# Altium PCB Peggy Receiver.PcbDoc
Units mm, origin at the board's own origin, x right, y up, seen from the top; angles counter-clockwise.
Board outline 30 x 53.7 mm, 2 copper layers (Top Layer, Bottom Layer), stack 1.534 mm thick; 30 components, 25 nets, 116 pads, 8 vias.
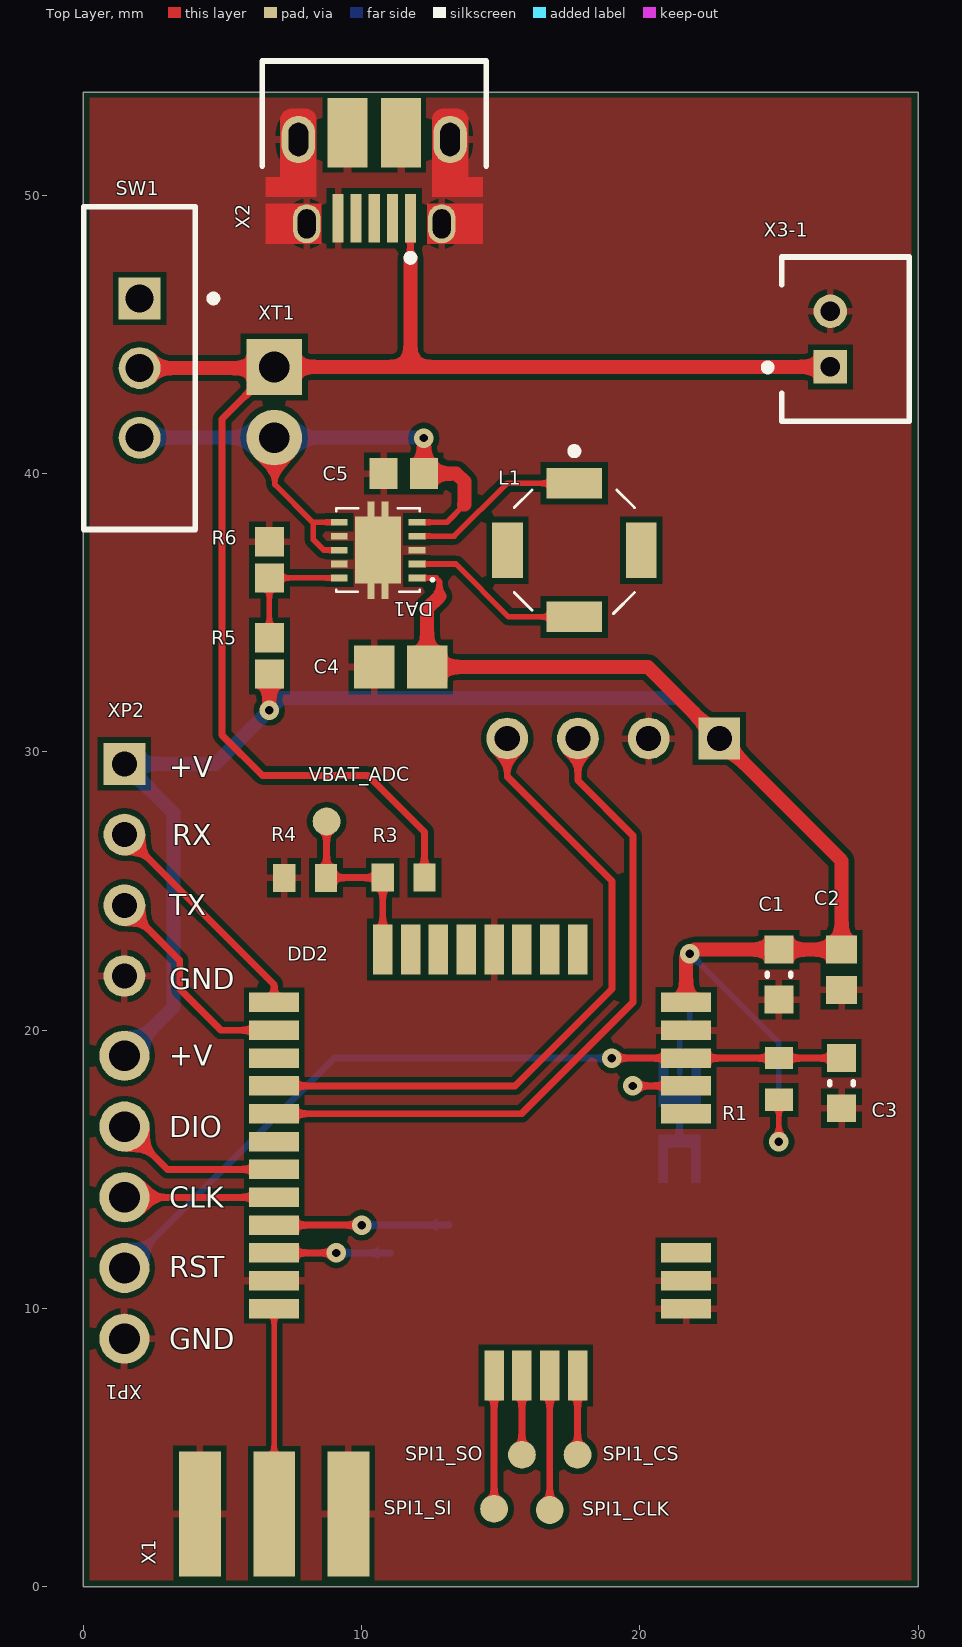
[diagram p0: Top Layer view]
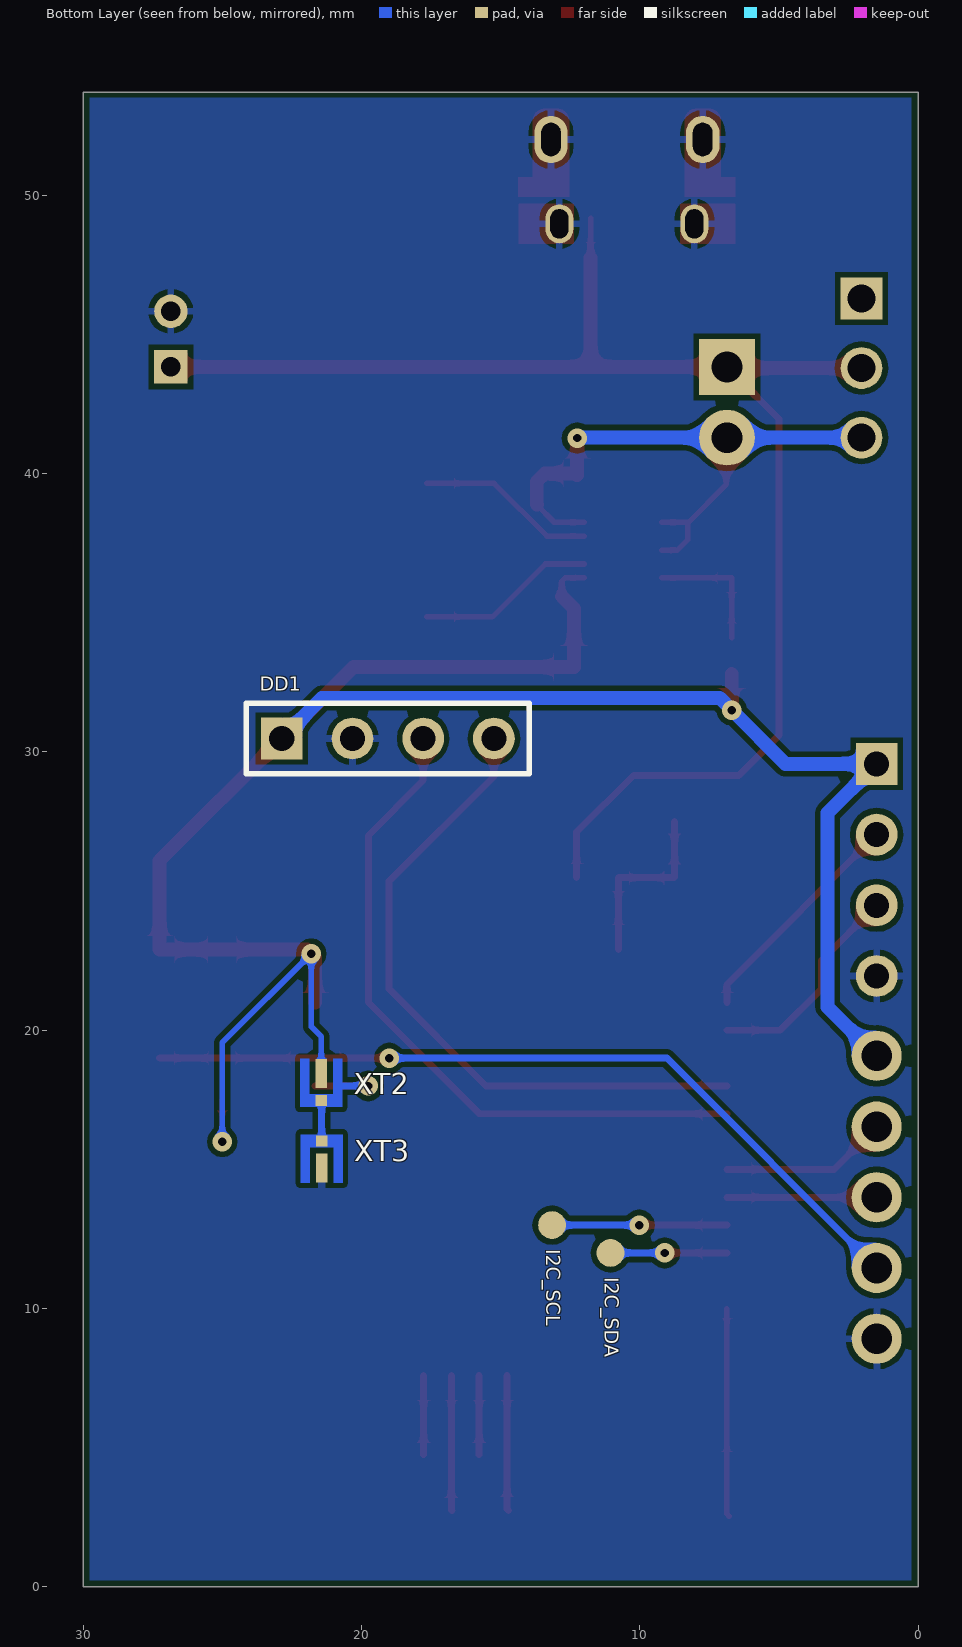
[diagram p1: Bottom Layer view, seen from below]
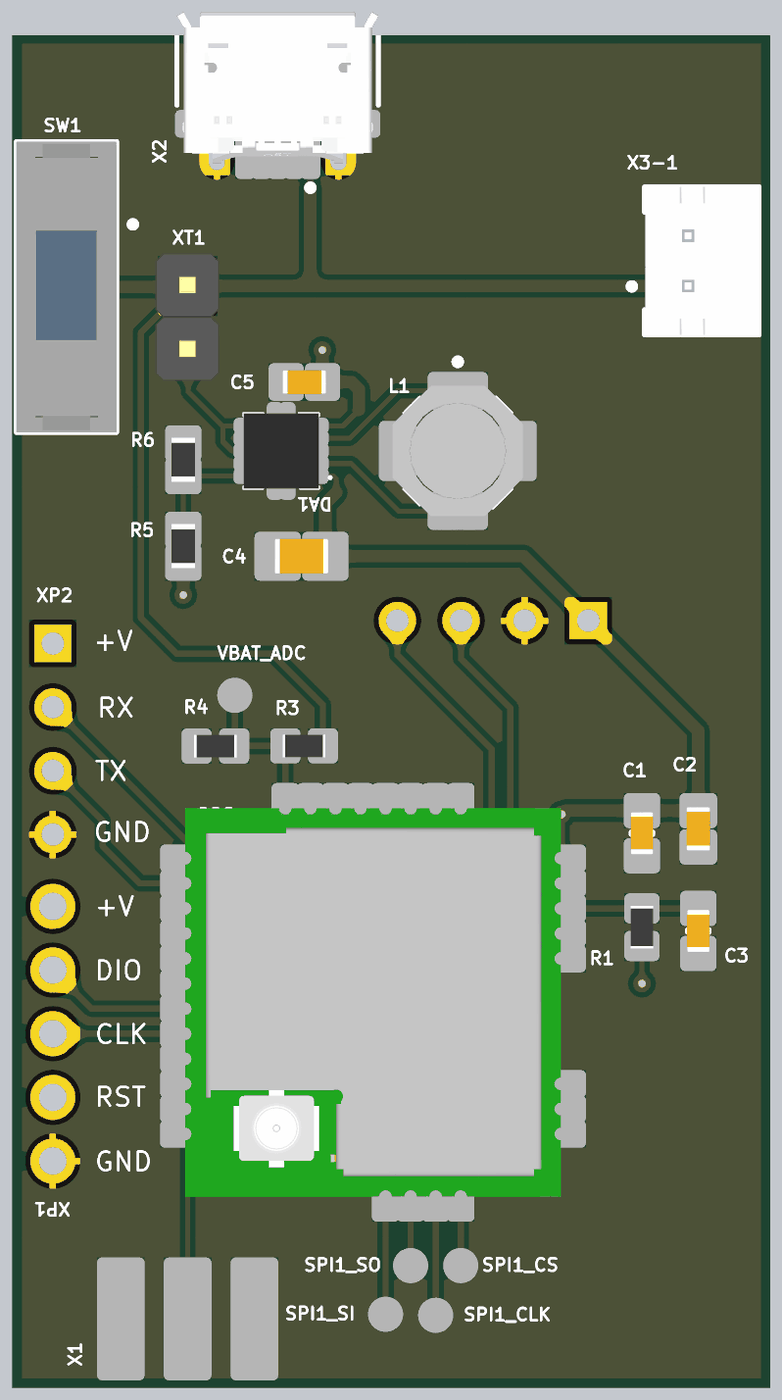
[diagram p2: 3D render of the assembled board from above, using the file's embedded part models]

## Layer stack, top to bottom
Top Solder: solder mask 0.0127, Solder Resist, Dk 3.3
Top Layer: signal copper 0.0178
Dielectric1: core 1.4986, FR-4, Dk 4.3
Bottom Layer: signal copper 0.0178
Bottom Solder: solder mask 0.0127, Solder Resist, Dk 3.3

## Board outline
0,0 0,53.7 30,53.7 30,0

## Design rules (kind name [scope] priority, off if disabled: settings)
Clearance [All] p1: gap=0.2 ignorepadtopadclearanceinfootprint=FALSE
ComponentClearance [All] p1: gap=0.25 collisioncheckmode=3 verticalgap=0.25 showdistances=FALSE
DiffPairsRouting [All] p1: maxlimit=0.25 minlimit=0.15 mostfreqgap=0.25 toplayer_minwidth=0.15 toplayer_maxwidth=0.254 toplayer_prefwidth=0.254 bottomlayer_minwidth=0.15 bottomlayer_maxwidth=0.254 bottomlayer_prefwidth=0.254 maxuncoupledlength=12.7
HoleSize [All] p1: absolutevalues=TRUE maxlimit=8 minlimit=0.3 maxpercent=80.000 minpercent=20.000
MinimumAnnularRing [All] p1: minimumring=0.2
MinimumSolderMaskSliver [All] p1: minsoldermaskwidth=0.15
PasteMaskExpansion [All] p1: expansion=0.2
PlaneClearance [All] p1: clearance=0.381
PlaneConnect [All] p1: pad.planeconnectstyle=Relief pad.reliefexpansion=0.508 pad.reliefentries=4 pad.reliefconductorwidth=0.254 pad.reliefairgap=0.254 via.planeconnectstyle=Direct via.reliefexpansion=0.508 via.reliefentries=4 via.reliefconductorwidth=0.254 via.reliefairgap=0.254
PolygonConnect PolygonConnect_GND [(InNet('GND') AND InComponent('DA1'))] p1: thpad.connectstyle=Relief thpad.reliefconductorwidth=0.254 thpad.reliefentries=4 thpad.polygonreliefangle="90 Angle" thpad.airgapwidth=0.2 smdpad.connectstyle=Direct smdpad.reliefconductorwidth=0.254 smdpad.reliefentries=4 smdpad.polygonreliefangle="90 Angle" smdpad.airgapwidth=0.254 via.connectstyle=Relief via.reliefconductorwidth=0.254 via.reliefentries=4 via.polygonreliefangle="90 Angle" via.airgapwidth=0.2
PolygonConnect [All] p2: thpad.connectstyle=Relief thpad.reliefconductorwidth=0.254 thpad.reliefentries=4 thpad.polygonreliefangle="90 Angle" thpad.airgapwidth=0.2 smdpad.connectstyle=Relief smdpad.reliefconductorwidth=0.254 smdpad.reliefentries=4 smdpad.polygonreliefangle="90 Angle" smdpad.airgapwidth=0.2 via.connectstyle=Direct via.reliefconductorwidth=0.254 via.reliefentries=4 via.polygonreliefangle="90 Angle" via.airgapwidth=0.254
RoutingCorners [All] p1: cornerstyle=45-Degree minsetback=2.5 maxsetback=2.5
RoutingVias [All] p1: holewidth=0.3 width=0.6 viastyle="Through Hole" minholewidth=0.3 minwidth=0.6 maxholewidth=0.5 maxwidth=0.8
SMDEntry [All] p1: side=TRUE corner=TRUE anyangle=FALSE
SMDNeckDown [All] p1: percent=100.000
SMDToCorner [All] p1: distance=78740
SilkToSilkClearance [All] p1: silktosilkclearance=0.15
SilkToSolderMaskClearance SilkscreenOverComponentPads [IsPad] p1: minsilkscreentomaskgap=0.15 clearancetoexposedcopper=TRUE
SolderMaskExpansion [All] p1: expansion=0.2 istentingtop=FALSE
UnRoutedNet [All] p1: checkbadconnections=TRUE
Width [All] p1: maxlimit=0.5 minlimit=0.15 preferedwidth=0.2 minimp=50.000000 maximp=50.000000 favimp=50.000000
19 further rules are at their usual default settings.

## Components (designator, comment, footprint, x,y, rotation, side; value= is the part's Value field where it differs from the comment)
C1 "GCM188R71H104KA57D" CAPC1608X09M 25,22 r90 top value=100nF
C2 "C0603C106M8PAC7867" CAPC1608X87X35ML15T15 27.25,22.175 r90 top value=10µF
C3 "GCM188R71H104KA57D" CAPC1608X09M 27.25,18.1 r90 top value=100nF
C4 "C2012X5R1C226K125AC" CAPC2013X140X45ML15T25 11.412,33.05 r0 top value=22µF
C5 "C0603C106M8PAC7867" CAPC1608X87X35ML15T15 11.525,40 r0 top value=10µF
DA1 "TPS63000IDRCRQ1" TPS63002DRCR 10.6,37.25 r180 top
DD1 "HC-08" HC-08 22.86,30.48 r180 bottom
DD2 "RAK3172(H)" RAK3172(H)-Footprint-1 21.767,7.5 r90 top
I2C_SCL "TP_1MM" "New footprint 1" 13.15,13 r90 bottom
I2C_SDA "TP_1MM" "New footprint 1" 11.05,12 r90 bottom
L1 "SRU5018-3R5Y" SRU5018680Y 17.65,37.25 r90 top value=3.5µH
R1 "RNCF0603BTE10K0" RESC1608X55X25ML10T15 25,18.25 r90 top
R3 "RMCF0603FT100K" RESC1608X55X25ML10T15 11.517,25.483 r0 top
R4 "ERJ-3EKF2373V" RESC1608X55X25ML10T15 7.975,25.475 r0 top
R5 "RMCF0603JT1M00" RESC1608X95X40ML15T20 6.694,33.45 r270 top value=1M
R6 "ERJ-3EKF1783V" RESC1608X95X40ML15T20 6.694,36.9 r270 top value=178k
SPI1_CLK "TP_1MM" "New footprint 1" 16.767,2.767 r90 top
SPI1_CS "TP_1MM" "New footprint 1" 17.767,4.75 r270 top
SPI1_SI "TP_1MM" "New footprint 1" 14.767,2.809 r90 top
SPI1_SO "TP_1MM" "New footprint 1" 15.767,4.75 r90 top
SW1 "EG1218" ESWI-EG1218_V 2.032,43.79 r270 top
VBAT_ADC "TP_1MM" "New footprint 1" 8.75,27.5 r90 top
X1 "CON-SMA-EDGE-S" RFSOLUTIONS_CON-SMA-EDGE-S 6.867,2.623 r180 top
X2 "10103594-0001LF" FCI-10103594-0001LF_V 10.462,50.61 r180 top
X3-1 "B2B-PH-K-S" JST-S2B-PH-K-S_V 29.296,44.83 r90 top
XP1 "5-146278-5" 5-146278-8-Footprint-1 1.488,14 r270 top
XP2 "61300411121" 20021311-00010T4LF-Footprint-1 1.488,29.57 r270 top
XT1 "Jumper_1x2" "CON%3A PLS-2" 6.867,42.56 r270 top
XT2 "Jumper_solderable" JUMPER-Footprint-2 21.442,18.075 r180 bottom
XT3 "Jumper_solderable" JUMPER-Footprint-2 21.425,15.425 r0 bottom

## Footprints (in the part's own frame and the unit in brackets; to place one, negate y for a bottom-side part, rotate by r counter-clockwise, add the part's x,y. Pads: shape width x height; smd on the part's side, far side on the other; paste and mask are expansions set on the pad)
5-146278-8-Footprint-1 [mm]
  round 1.8 hole 1.1: 1(-5.08,0) 2(-2.54,0) 3(0,0) 4(2.54,0) 5(5.08,0)
20021311-00010T4LF-Footprint-1 [mm]
  rect 1.5x1.5 hole 0.9: 1(0,0)
  round 1.5 hole 0.9: 2(2.54,0) 3(5.08,0) 4(7.62,0)
CAPC1608X09M [mm] "Chip Capacitor, 2-Leads, Body 1,60x0,80mm, IPC Low Density"
  rect 1x1.05 smd: 1(-0.9,0) 2(0.9,0)
  silkscreen extent -0.05,-0.43 0.05,0.43, body extent -0.85,-0.45 0.85,0.45, height 0.9
CAPC1608X87X35ML15T15 [mm] "Chip Capacitor, 2-Leads, Body 1.75x0.95mm, IPC Low Density"
  rect 1x1.1 smd: 1(-0.725,0) 2(0.725,0)
  body extent -0.87,-0.48 0.87,0.48, height 0.87
CAPC2013X140X45ML15T25 [mm] "Chip Capacitor, 2-Leads, Body 2.15x1.4mm, IPC Low Density"
  rect 1.45x1.55 smd: 1(-0.95,0) 2(0.95,0)
  body extent -1.07,-0.7 1.08,0.7, height 1.4
"CON%3A PLS-2" [mm]
  rect 2x2 hole 1.1: 1(-1.27,0)
  round 2 hole 1.1: 2(1.27,0)
  body extent -2.57,-1.28 2.51,1.26, height 8.54
ESWI-EG1218_V [mm] "THD, 3-Leads, Body 11.6x4mm, Pitch 2.5mm"
  rect 1.5x1.5 hole 1: 1(-2.5,0)
  round 1.5 hole 1: 2(0,0) 3(2.5,0)
  silkscreen extent -5.8,-2 5.8,2.78, body extent -5.8,-2 5.8,2, height 7.4
FCI-10103594-0001LF_V [mm] "SMD, 5-Leads, Body 8.04x5.62mm, Pitch 0.65 mm"
  rect 0.4x1.75 smd: 1(-1.3,1.435) 2(-0.65,1.435) 3(0,1.435) 4(0.65,1.435) 5(1.3,1.435)
  oval 1x1.4 hole 0.65 slot 1.05 at 90 deg: 6(-2.425,1.64) 7(2.425,1.64)
  oval 1.2x1.7 hole 0.7 slot 1.2 at 90 deg: 8(2.725,-1.39) 9(-2.725,-1.39)
  rect 1.425x2.5 smd: 10(-0.962,-1.64) 11(0.962,-1.64)
  Top Layer region: 3.9,2.37 1.9,2.37 1.9,0.91 3.9,0.91
  Top Layer region: -3.9,0.91 -1.9,0.91 -1.9,2.37 -3.9,2.37
  Top Layer region: 3.375,-0.04 3.375,-2.09 3.373,-2.129 3.369,-2.167 3.365,-2.185 3.359,-2.203 3.348,-2.239 3.329,-2.277 3.308,-2.312 3.284,-2.344 3.258,-2.374 3.227,-2.401 3.194,-2.426 3.158,-2.446 3.121,-2.464 3.08,-2.477 3.049,-2.483 3.012,-2.488 2.975,-2.49 2.475,-2.49 2.432,-2.488 2.391,-2.481 2.351,-2.471 2.312,-2.456 2.28,-2.439 2.249,-2.421 2.217,-2.396 2.19,-2.37 2.164,-2.342 2.143,-2.312 2.121,-2.277 2.105,-2.241 2.093,-2.209 2.088,-2.192 2.084,-2.175 2.08,-2.155 2.076,-2.134 2.075,-2.112 2.075,-2.09 2.075,-0.04 2.075,0.66 3.9,0.66 3.9,-0.04
  Top Layer region: -3.375,-0.04 -3.375,-2.09 -3.373,-2.129 -3.369,-2.167 -3.365,-2.185 -3.359,-2.203 -3.348,-2.239 -3.329,-2.277 -3.308,-2.312 -3.284,-2.344 -3.258,-2.374 -3.227,-2.401 -3.194,-2.426 -3.158,-2.446 -3.121,-2.464 -3.08,-2.477 -3.049,-2.483 -3.012,-2.488 -2.975,-2.49 -2.475,-2.49 -2.432,-2.488 -2.391,-2.482 -2.351,-2.471 -2.312,-2.456 -2.28,-2.439 -2.249,-2.421 -2.217,-2.397 -2.19,-2.37 -2.164,-2.342 -2.143,-2.312 -2.121,-2.277 -2.105,-2.241 -2.093,-2.209 -2.088,-2.192 -2.084,-2.175 -2.08,-2.155 -2.076,-2.134 -2.075,-2.112 -2.075,-2.09 -2.075,-0.04 -2.075,0.66 -3.9,0.66 -3.9,-0.04
  silkscreen extent -4.02,-4.21 4.02,2.98, body extent -4.02,-4.15 4.02,1.88, height 2.9
HC-08 [mm] "Bluetooth 4.0 Module HC-08"
  rect 1.5x1.5 hole 0.9: 1(0,0)
  round 1.5 hole 0.9: 2(2.54,0) 3(5.08,0) 4(7.62,0)
  silkscreen extent -1.27,-1.27 8.89,1.27
JST-S2B-PH-K-S_V [mm] "THD, 2-Leads, Body 7.6x5.9mm, Pitch 2mm"
  rect 1.2x1.2 hole 0.7: 1(-1,2.45)
  round 1.2 hole 0.7: 2(1,2.45)
  silkscreen extent -2.95,-0.38 2.95,4.82, body extent -2.95,-0.34 2.95,4.16, height 6
JUMPER-Footprint-2 [mm]
  rect 0.4x0.4 smd paste+0 mask+0: 1(0,-0.6)
  rect 0.4x1.05 smd mask+0: 2(0,0.375)
  Top Layer region: 0.425,-0.375 0.425,0.9 0.75,0.9 0.75,-0.825 -0.75,-0.825 -0.75,0.9 -0.425,0.9 -0.425,-0.375
"New footprint 1" [mm]
  round 1 smd: 1(0,0)
RAK3172(H)-Footprint-1 [mm]
  rect 0.7x1.8 smd: 1(13.5,14.9) 2(12.5,14.9) 3(11.5,14.9) 4(10.5,14.9) 5(9.5,14.9) 6(8.5,14.9) 7(7.5,14.9) 8(6.5,14.9) 9(5.5,14.9) 10(4.5,14.9) 11(3.5,14.9) 12(2.5,14.9) 17(2.5,0.1) 18(3.5,0.1) 19(4.5,0.1) 20(9.5,0.1) 21(10.5,0.1) 22(11.5,0.1) 23(12.5,0.1) 24(13.5,0.1)
  rect 1.8x0.7 smd: 13(0.1,7) 14(0.1,6) 15(0.1,5) 16(0.1,4) 25(15.4,4) 26(15.4,5) 27(15.4,6) 28(15.4,7) 29(15.4,8) 30(15.4,9) 31(15.4,10) 32(15.4,11)
  body extent 0,0 15.5,15, height 3.5
RESC1608X55X25ML10T15 [mm] "Chip Resistor, 2-Leads, Body 1.70x0.90mm, IPC Low Density"
  rect 0.8x1 smd: 1(-0.75,0) 2(0.75,0)
  body extent -0.85,-0.45 0.85,0.45, height 0.55
RESC1608X95X40ML15T20 [mm] "Chip Resistor, 2-Leads, Body 1.75x0.95mm, IPC Low Density"
  rect 1.05x1.05 smd: 1(-0.65,0) 2(0.65,0)
  body extent -0.87,-0.48 0.87,0.48, height 0.95
RFSOLUTIONS_CON-SMA-EDGE-S [mm] "CONN SMA JACK STR EDGE MNT"
  rect 1.5x4.5 smd: 1(0,0) 2(-2.667,0) 2(2.667,0)
  body extent -3.18,-1.52 3.18,11.63, height 3.55
SRU5018680Y [mm]
  rect 1.1x2 smd: 1(2.4,0) 2(-2.4,0)
  rect 2x1.1 smd: 3(0,-2.4) 4(0,2.4)
  silkscreen extent -2.29,-2.16 3.68,2.16, body extent -2.6,-2.6 2.6,2.6, height 1.8
TPS63002DRCR [mm]
  rect 0.6x0.24 smd: 1(-1.4,1) 2(-1.4,0.5) 3(-1.4,0) 4(-1.4,-0.5) 5(-1.4,-1) 6(1.4,-1) 7(1.4,-0.5) 8(1.4,0) 9(1.4,0.5) 10(1.4,1)
  rect 1.65x2.4 smd: 11(0,0)
  rect 0.25x0.6 smd: 12(0.25,1.45) 13(-0.25,1.45) 14(0.25,-1.45) 15(-0.25,-1.45)
  silkscreen extent -2.01,-1.5 1.5,1.5, body extent -1.5,-1.5 1.5,1.5, height 1

## Part data
C1 C3: library part CMP-001-00128-7, "CAP CER 0.1UF 50V X7R 0603", Capacitance=100nF, Case Code (Metric)=1608, Case/Package=0603, Color=Grey, Dielectric=X7R, Manufacturer=Murata, Max Operating Temperature=125°C, Min Operating Temperature=-55°C, Package Quantity=1, Ratings=AEC-Q200, Tolerance=10%, Voltage=50V, Approvals=CSA,UR, ComponentLink1Description=https://datasheet.ciiva.com/16624/product-16624562.pdf?src-supplier=Avnet+Europe, ComponentLink1URL=https://datasheet.ciiva.com/16624/product-16624562.pdf?src-supplier=Avnet+Europe, ComponentLink2Description=https://datasheet.ciiva.com/133/product-133574.pdf?src-supplier=Digi-Key, ComponentLink2URL=https://datasheet.ciiva.com/133/product-133574.pdf?src-supplier=Digi-Key, ComponentLink3Description=https://datasheet.ciiva.com/133/product-133575.pdf?src-supplier=Digi-Key, ComponentLink3URL=https://datasheet.ciiva.com/133/product-133575.pdf?src-supplier=Digi-Key, ComponentLink4Description=https://datasheet.ciiva.com/18183/getdatasheetpartid-98693-18183626.pdf?src-supplier=Verical, ComponentLink4URL=https://datasheet.ciiva.com/18183/getdatasheetpartid-98693-18183626.pdf?src-supplier=Verical, ComponentLink5Description=https://datasheet.ciiva.com/11786/0900766b80ef92d0-11786863.pdf?src-supplier=RSComponents, ComponentLink5URL=https://datasheet.ciiva.com/11786/0900766b80ef92d0-11786863.pdf?src-supplier=RSComponents, ComponentLink6Description=https://datasheet.ciiva.com/133/product-133573.pdf?src-supplier=Digi-Key, ComponentLink6URL=https://datasheet.ciiva.com/133/product-133573.pdf?src-supplier=Digi-Key, ComponentLink7Description=https://datasheet.ciiva.com/2989/product-2989242.pdf?src-supplier=Avnet, ComponentLink7URL=https://datasheet.ciiva.com/2989/product-2989242.pdf?src-supplier=Avnet, ComponentLink8Description=https://datasheet.ciiva.com/16497/product-16497247.pdf?src-supplier=Future+Electronics, ComponentLink8URL=https://datasheet.ciiva.com/16497/product-16497247.pdf?src-supplier=Future+Electronics, Construction=Flat, Depth=0.8mm, Design Item ID=1_16, Height=0.8mm, Lead Free="Lead Free", Length=1.6mm, Manufacturer Part Number=GCM188R71H104KA57D, Mount="Surface Mount", Packaging="Tape and Reel", Pricing 1="1=0,11000, 10=0,07900, 50=0,04280, 100=0,03500, 500=0,02502, 1000=0,01966 (USD)", Radiation Hardening=No, REACH SVHC="No SVHC", RoHS=Yes, RoHS Compliant=Yes, Series=GCM, Source=Meteo_1.SCHLIB, Stock 1=4755830, Termination=SMD/SMT, Thickness=0.035inch, Voltage Rating=50V, Voltage Rating (DC)=50V, Width=0.031inch
C2 C5: library part CMP-009-00284-3, "Cap Ceramic 10uF 10V X5R 20% SMD 0603 85°C Paper T/R", Capacitance=10µF, Case Code (Imperial)=0603, Case Code (Metric)=1608, Manufacturer=KEMET, Max Operating Temperature=85°C, Min Operating Temperature=-55°C, Tolerance=20%, Voltage Rating=10V, Case/Package=0603, Manufacturer Part Number=C0603C106M8PAC7867, Mount="Surface Mount", Mounting Technology=SMT, Packaging="Cut Tape", Pins=2, RoHS Compliant=Yes
C4: library part CMP-001-00144-2, "TDK - C2012X5R1C226K125AC - SMD Multilayer Ceramic Capacitor, 22 µF, 16 V, 0805 [2012 Metric], ± 10%, X5R, C Series", Capacitance=22µF, Case Code (Imperial)=0805, Case Code (Metric)=2012, Dielectric=X5R, Dielectric Material=Ceramic, Manufacturer=TDK, Max Operating Temperature=85°C, Min Operating Temperature=-55°C, Package Quantity=1, Tolerance=10%, Voltage=16V, Case/Package=0805, Construction=Flat, Depth=1.25mm, Height=1.25mm, Lead Free="Lead Free", Length=2mm, Manufacturer Part Number=C2012X5R1C226K125AC, Mount="Surface Mount", Number of Pins=2, Packaging="Tape and Reel", REACH SVHC="No SVHC", Resistor Type=Ceramic, RoHS Compliant=Yes, Series=C, Termination=Wraparound, Thickness=0.057inch, Voltage Rating=16V, Voltage Rating (DC)=16V, Weight=0.000194oz, Width=0.049inch
DA1: library part CMP-031-00015-5, "IC REG BUCK BOOST ADJ 1.6A 10SON", Case/Package=VSON, Manufacturer="Texas Instruments", Manufacturer Part Number=TPS63000DRCR, Max Input Voltage=5.5V, Max Operating Temperature=85°C, Max Output Current=1.2A, Min Input Voltage=1.8V, Min Operating Temperature=-40°C, Min Output Voltage=1.2V, Output Current=1.6A, Package Quantity=1, Quiescent Current=40uA, Switching Frequency=1.5MHz, Contact Plating=Gold, Efficiency=96%, Lead Free="Lead Free", Max Output Voltage=5.5V, Number of Outputs=1, Number of Pins=10, Operating Supply Voltage=5.5V, Output Configuration=Positive, Output Type=Adjustable, Output Voltage=5.5V, Packaging="Tape and Reel", RoHS Compliant=Yes, Series="Automotive, AEC-Q100", Synchronous Rectifier=Yes, Topology=Buck-Boost, Weight=0.000921oz, Width=3mm
DD1: library part CMP-00025-00009-1, "Bluetooth 4.0 Module", Manufacturer=HC-08, Manufacturer Part Number=HC-08
DD2: library part CMP-00025-00003-1, "RAK3172 WisDuo LPWAN Module", Manufacturer="RAK Wireless", Manufacturer Part Number=RAK3172(H)
I2C_SCL I2C_SDA SPI1_CLK SPI1_CS SPI1_SI SPI1_SO VBAT_ADC: library part CMP-002-00080-5, "Test Point, 1mm diam", Manufacturer=SRG_DEV, Manufacturer Part Number=TP_1MM, Pins=1
L1: library part CMP-006-00039-3, "Ind Power Shielded Wirewound 3.5uH 30% 100KHz 9Q-Factor Ferrite 2.1A T/R", Case/Package=5018, Current Rating=2.1A, DC Resistance (DCR)=32mR, Inductance=3.5uH, Manufacturer=Bourns, Max Operating Temperature=125°C, Min Operating Temperature=-40°C, Package Quantity=1000, Saturation Current=1.7A, Self Resonant Frequency=90MHz, Test Frequency=100kHz, Tolerance=30%, Core Material=Ferrite, DC Current=2.1A, Depth=5.4mm, Height=1.8mm, Length=5.2mm, Manufacturer Part Number=SRU5018-3R5Y, Max DC Current=2.1A, Military Standard=Not, Mount="Surface Mount", Number of Pins=2, Packaging="Tape and Reel", Q Factor=9, RoHS Compliant=Yes, Series=SRU5018, Shielding=Shielded, Termination=SMD/SMT, Width=0.205inch
R1: library part CMP-009-00270-3, "RES 10K OHM 0.1% 1/16W 0603", Case Code (Imperial)=0603, Case Code (Metric)=1608, Max Operating Temperature=155°C, Max Power Dissipation=100mW, Min Operating Temperature=-55°C, Package Quantity=5000, Power Rating=63mW, Resistance=10k, Resistor Type="Thin Film", Temperature Coefficient=25ppm/°C, Tolerance=0.1%, Voltage Rating=75V, Case/Package=0603, Component Comment="10k 63mW", Contact Plating=Tin,Matte, Features="Moisture Resistant", Height=0.022inch, Lead Free="Lead Free", Length=0.063inch, Mount="Surface Mount", Number of Terminations=2, Packaging="Tape and Reel", Pins=2, Radiation Hardening=No, RoHS Compliant=Yes, Series=RNCF, Size Code=0603, Width=0.031inch
R3: library part CMP-009-00253-1, "RES 100K OHM 1% 1/10W 0603", Case Code (Imperial)=0603, Case Code (Metric)=1608, Manufacturer="Stackpole Electronics Inc", Max Operating Temperature=155°C, Max Power Dissipation=100mW, Min Operating Temperature=-55°C, Resistance=100k, Resistor Type="Thick Film", Temperature Coefficient=100ppm/°C, Tolerance=1%, Working Voltage=75V, Case/Package=0603, Component Comment="100k 100mW", Construction=Rectangular, Contact Plating=Tin,Matte, Depth=0.8mm, Features="Automotive AEC-Q200", Height=0.022inch, Lead Free="Lead Free", Length=1.55mm, Manufacturer Part Number=RMCF0603FT100K, Military Standard=Not, Mount="Surface Mount", Number of Terminations=2, Packaging="Tape and Reel", Power Rating=100mW, Radiation Hardening=No, RoHS Compliant=Yes, Series=RMCF, Width=0.031inch
R4: library part CMP-009-00311-2, "RES SMD 237K OHM 1% 1/10W 0603", Case Code (Imperial)=0603, Case Code (Metric)=1608, Manufacturer=Panasonic, Max Operating Temperature=155°C, Max Power Dissipation=100mW, Min Operating Temperature=-55°C, Package Quantity=1, Resistance=237k, Resistance Tolerance=1%, Resistor Type="Thick Film", Temperature Coefficient=100ppm/°C, Voltage Rating=75V, Voltage Rating (DC)=50V, Case/Package=0603, Component Comment="237k 100mW", Construction=Rectangular, Contact Plating=Tin, Depth=0.8mm, Features="Automotive AEC-Q200", Height=0.45mm, Length=1.6mm, Manufacturer Part Number=ERJ-3EKF2373V, Military Standard=Not, Mount="Surface Mount", Number of Terminations=2, Packaging="Tape and Reel", Power Rating=100mW, Radiation Hardening=No, REACH SVHC=Yes, RoHS Compliant=Yes, Series=ERJ, Technology="THICK FILM", Termination=SMD/SMT, Tolerance=1%, Width=0.8mm
R5: library part CMP-00024-2, "RES 1M OHM 5% 1/10W 0603", Case Code (Imperial)=0603, Case Code (Metric)=1608, Manufacturer="Stackpole Electronics", Max Operating Temperature=155°C, Max Power Dissipation=100mW, Min Operating Temperature=-55°C, Resistance=1M, Resistor Type="Thick Film", Temperature Coefficient=200ppm/°C, Tolerance=5%, Working Voltage=75V, Case/Package=0603, Component Comment="1M 100mW", Construction=Rectangular, Contact Plating=Tin,Matte, Depth=0.8mm, Features="Automotive AEC-Q200", Height=0.022inch, Lead Free="Lead Free", Length=1.55mm, Manufacturer Part Number=RMCF0603JT1M00, Military Standard=Not, Mount="Surface Mount", Number of Terminations=2, Packaging="Tape and Reel", Power Rating=100mW, Radiation Hardening=No, RoHS Compliant=Yes, Series=RMCF, Technology="THICK FILM", Width=0.031inch
R6: library part CMP-00025-2, "ICK FILM, RESISTOR, 178KOHM, 100mW, ±1%; Product Range:PANASONIC - ERJ Series; Resistance:178kohm; Power Rating:100mW; Resistance Tolerance:± 1%; Resistor Case Style:0603 ^1608 Metric]; Resistor Element Type:Thick Film; MSL:-", Case Code (Imperial)=0603, Case Code (Metric)=1608, Manufacturer=Panasonic, Max Operating Temperature=155°C, Max Power Dissipation=100mW, Min Operating Temperature=-55°C, Package Quantity=1, Resistance=178k, Resistance Tolerance=1%, Resistor Type="Thick Film", Temperature Coefficient=100ppm/°C, Voltage Rating=75V, Voltage Rating (DC)=50V, Case/Package=0603, Component Comment="178k 100mW", Construction=Rectangular, Contact Plating=Tin, Depth=0.8mm, Features="Automotive AEC-Q200", Height=0.45mm, Lead Free="Lead Free", Length=1.6mm, Manufacturer Part Number=ERJ-3EKF1783V, Military Standard=Not, Mount="Surface Mount", Number of Terminations=2, Packaging="Tape and Reel", Power Rating=100mW, REACH SVHC="No SVHC", RoHS Compliant=Yes, Series=ERJ, Technology="THICK FILM", Termination=SMD/SMT, Tolerance=1%, Width=0.8mm
SW1: library part CMP-011-00006-2, "Slide Switch, SPDT, 500 V, -20 to 70 degC, 3-Pin THD, RoHS, Bulk", Contact Current Rating=200mA, Manufacturer=E-Switch, Max Operating Temperature=70°C, Min Operating Temperature=-20°C, Operating Force=250gf, Package Description="3-Pin Through Hole Device, Body 11.6 x 4 mm, Pitch 2.5 mm", Package Quantity=1000, Voltage Rating (AC)=30V, Case/Package=EG1218, Contact Finish=Silver, Contact Material=Copper, Contact Plating=Silver, Current Rating=200mA, Datasheet URL=https://www.e-switch.com/system/asset/product_line/data_sheet/119/EG.pdf, Datasheet Version=Oct-15, Manufacturer Part Number=EG1218, Manufacturer URL=http://www.e-switch.ch/en/, Mounting Technology=TH, Package Reference=EG1218, Packaging=Bulk, Pins=3, RoHS Compliant=True, Throw Configuration=SPDT, Voltage Rating (DC)=30V
X1: library part CMP-002-00086-2, "CONN SMA JACK STR EDGE MNT", Case/Package=SMA, Manufacturer="RF Solutions", Package Quantity=1, Connector Type=SMA,Socket, Fastening Type=Threaded, Manufacturer Part Number=CON-SMA-EDGE-S, Mount=Edge, Number of Ports=1, Pins=3, Termination=Solder
X2: library part CMP-002-00038-6, "Micro USB 2.0 B Receptacle, 5 Position, Height 3.24 mm, -55 to 85 degC, RoHS, Tape and Reel", Case/Package=FCI-10103594-0001LF, Current Rating=1.8A, Manufacturer="Amphenol ICC (FCI)", Max Operating Temperature=85°C, Min Operating Temperature=-55°C, Package Description="5-Pin Surface Mount Device, Body 8.04 x 5.62 mm", Package Quantity=1500, Voltage Rating=100V, Connector Type=USB, Contact Material=Copper, Contact Plating=Gold, Datasheet URL=http://portal.fciconnect.com/Comergent//fci/drawing/10103594.pdf, Datasheet Version="Rev. A, 06/2010", Gender=Female, Lead Pitch=0.65mm, Manufacturer Part Number=10103594-0001LF, Manufacturer URL=http://portal.fciconnect.com/, Mounting Technology=SM, Package Reference=FCI-10103594-0001LF, Packaging=TapeandReel, Pins=5, RoHS Compliant=True
X3-1: library part CMP-002-00125-1, "CONN HEADER VERT 2POS 2MM", Case/Package=S2B-PH-K-S, Manufacturer="Japan Solderless Terminals", Manufacturer Part Number="JST B2B-PH-K-S(LF)(SN)", Max Operating Temperature=85°C, Min Operating Temperature=-25°C, Connector Type=Header, Gender=Male, Height=0.35inch, Length=0.2inch, Mounting Technology=SM, Pins=2, RoHS Compliant=Unknown, Weight=0.0625lb, Width=0.24inch
XP1: library part CMP-002-00131-1, "Conn Unshrouded Header HDR 5 POS 2.54mm Solder ST Thru-Hole Carton", Color=Black, Contact Current Rating=3A, Flammability Rating="UL94 V-0", High Temperature Housing=Yes, Manufacturer="TE Connectivity", Manufacturer Part Number=5-146278-8, Max Operating Temperature=105°C, Min Operating Temperature=-65°C, Package Quantity=480, Approvals=CSA, Board Standoff="Yes (With)", Connector Type=Plug,Header,Pin, Contact Gender=Male, Contact Material=Bronze, Contact Mating Length=0.23inch, Contact Plating=Tin, Contact Post Length=0.12inch, Contact Protection="No (Without)", Contact Shape=Square, Contact Type="Male Pin", Depth=2.34mm, ELV=Compliant, Gasket="No (Without)", Gender=Male, High Speed Serial Data Connector=No, Housing Color=Black, Housing Material=Polymer, Keyed=No, Lead Free="Lead Free", Length=12.29mm, Mating Alignment="No (Without)", Mating Connector Lock="No (Without)", Mount="Through Hole", Number of Contacts=5, Number of Positions=5, Number of Rows=1, Orientation=Straight, Packaging=Carton, PCB Mount Retention=Without, PCB Mounting Orientation=Vertical, PCB Thickness=0.062inch, Pins=5, Pitch=2.54mm, Radiation Hardening=No, RoHS Compliant=Yes, Row Spacing=2.54mm, Selectively Loaded="No (Without)", Series="AMPMODU MOD II", Stabilizers="No (Without)", Strain Relief="No (Without)", Termination="Through Hole"
XP2: library part CMP-002-00092-4, "Conn Unshrouded Header HDR 4 POS 2.54mm Solder ST Thru-Hole Bag", Color=Black, Manufacturer="Würth Elektronik", Connector Type="Male Pin", Contact Material=Copper, Contact Mating Length=0.236inch, Contact Plating=Gold, Gender=Male, Lead Free="Lead Free", Manufacturer Part Number=61300411121, Mount="Through Hole", Number of Contacts=4, Number of Positions=4, Number of Rows=1, Packaging=Bulk, Pins=4, Pitch=0.1inch, Position=4, REACH SVHC=Unknown, RoHS Compliant=Yes, Termination=Solder
XT1: library part CMP-002-00088-9, "WURTH ELEKTRONIK - 61300211121 - Pin Header, Vertical, Board-to-Board, 2.54 mm, 1 Rows, 2 Contacts, Through Hole Straight", Color=Black, Current Rating=3A, Manufacturer="Wurth Electronics", Manufacturer Part Number=61300211121, Max Operating Temperature=125°C, Min Operating Temperature=-40°C, Supplier Part Number 1=732-5315-ND, Voltage Rating=250V, Connector Type="Male Pin", Contact Gender=Male, Contact Material="Copper Alloy,Copper", Contact Mating Length=0.236inch, Contact Plating=Gold, Contact Type="Male Pin", Gender=Male, Housing Material=PBT, Lead Free="Lead Free", Mount="Through Hole", Number of Contacts=2, Number of Positions=2, Number of Rows=1, Packaging=Bulk, Pins=2, Pitch=0.1inch, REACH SVHC=Unknown, Series=WR-PHD, Supplier 1=Digi-Key, Termination="Through Hole"
XT2 XT3: library part CMP-002-00130-2, "Solderable Jumper", Manufacturer="Home made", Max Operating Temperature=125°C, Min Operating Temperature=-40°C, Connector Type="Male Pin", Gender=Male, Manufacturer Part Number="Home made", Pins=2

## Via types
v1: diameter 0.7, hole 0.3, Top Layer to Bottom Layer, tented both sides, 8 vias

## Nets (pads, with @x,y where several pads share a name; then routed paths per layer and width w, separated by ;. In a path a pad name is that pad's centre, name@x,y a point inside that pad or via, vN(x,y) a via of type N, cw(c..) or ccw(c..) an arc to the next point about the centre after c; other vN are vias at no path point)
3.3V: C1.2 C2.2 C4.2 DA1.1 DD1.1 DD2.24 R1.1 R5.2 XP1.1 XP2.1 XT2.2 | length 82.8
  Top Layer w0.2: DA1.1 12.683,36.25 12.8,36.133 12.8,35.592 ; v1(25,16) R1.1
  Top Layer w0.5: v1(6.694,31.5) R5.2 ; 12.8,35.592 12.362,35.154 C4.2 20.29,33.05 DD1.1 27.25,26.09 C2.2 C1.2 21.96,22.9 v1@21.667,22.607 ; DD2.24 21.667,22.563 21.8,22.696 v1(21.8,22.75)
  Bottom Layer w0.2: XT2.2 21.442,18.775 21.442,19.775 21.8,20.133 v1(21.8,22.75) 25,19.55 v1(25,16)
  Bottom Layer w0.5: XP1.1 3.25,20.842 3.25,27.808 XP2.1 4.764,29.57 v1(6.694,31.5) 7.125,31.93 21.41,31.93 DD1.1
GND: C1.1 C2.1 C3.1 C4.1 C5.1 DA1.3 DA1.7 DA1.9 DA1.11 DA1.12 DA1.13 DA1.14 DA1.15 DD1.2 DD2.11 DD2.17 DD2.18 DD2.23 DD2.28 R4.1 R6.1 X1.2 X2.5 X2.6 X2.7 X2.8 X2.9 X2.10 X2.11 X3-1.2 XP1.5 XP2.4 XT3.2
LORA_RST: C3.2 DD2.22 R1.2 XP1.4 | length 28.9
  Top Layer w0.25: v1(19,19) DD2.22 R1.2 C3.2
  Bottom Layer w0.25: XP1.4 9.028,19 v1(19,19)
NetC5_2: C5.2 DA1.5 DA1.6 DA1.8 SW1.3 XT1.2 | length 22.2
  Top Layer w0.2: XT1.2 6.893,41.264 6.893,39.607 8.27,38.23 8.27,37.628 8.648,37.25 DA1.8 ; 8.25,38.25 DA1.6 ; DA1.5 13.07,38.25 13.692,38.872 13.692,38.888
  Top Layer w0.5: v1(12.243,41.275) 12.25,41.268 C5.2@12.25,39.95 ; C5.2 13.407,40 13.7,39.707 13.7,38.895 13.692,38.888
  Bottom Layer w0.5: SW1.3 XT1.2 12.228,41.29 v1(12.243,41.275)
NetDA1_2: DA1.2 L1.2 | length 6.4
  Top Layer w0.2: DA1.2 13.392,36.75 15.292,34.85 L1.2
NetDA1_4: DA1.4 L1.1 | length 6.4
  Top Layer w0.2: DA1.4 13.332,37.75 15.232,39.65 L1.1
NetDA1_10: DA1.10 R5.1 R6.2 | length 4.7
  Top Layer w0.2: R5.1 R6.2 DA1.10
NetDD1_3: DD1.3 DD2.5 | length 24.8
  Top Layer w0.25: DD2.5 15.75,17 19.75,21 19.75,27 17.78,28.97 DD1.3
NetDD1_4: DD1.4 DD2.4 | length 24.1
  Top Layer w0.25: DD2.4 15.525,18 19,21.475 19,25.357 15.24,29.117 DD1.4
NetDD2_9: DD2.9 I2C_SCL.1 | length 6.3
  Top Layer w0.25: DD2.9 v1(10.018,13)
  Bottom Layer w0.25: v1(10.018,13) I2C_SCL.1
NetDD2_10: DD2.10 I2C_SDA.1 | length 4.2
  Top Layer w0.25: DD2.10 v1(9.1,12)
  Bottom Layer w0.25: v1(9.1,12) I2C_SDA.1
NetDD2_12: DD2.12 X1.1 | length 7.5
  Top Layer w0.2: X1.1@6.786,2.542 X1.1 DD2.12
NetDD2_13: DD2.13 SPI1_SI.1 | length 4.9
  Top Layer w0.25: SPI1_SI.1@14.708,2.75 SPI1_SI.1 DD2.13
NetDD2_14: DD2.14 SPI1_SO.1 | length 2.8
  Top Layer w0.25: SPI1_SO.1 DD2.14
NetDD2_15: DD2.15 SPI1_CLK.1 | length 4.9
  Top Layer w0.25: SPI1_CLK.1@16.75,2.75 SPI1_CLK.1 DD2.15
NetDD2_16: DD2.16 SPI1_CS.1 | length 2.8
  Top Layer w0.25: SPI1_CS.1 DD2.16
NetDD2_21: DD2.21 XT2.1 XT3.1 | length 4.5
  Top Layer w0.25: v1(19.75,18) DD2.21
  Bottom Layer w0.25: v1(19.75,18) 20.867,18 ; XT3.1 21.425,17.458 XT2.1
NetTP1_1: 
NetTP2_1: 
RX: DD2.1 XP2.2 | length 8.3
  Top Layer w0.25: XP2.2 6.867,21.651 DD2.1
SWCLK: DD2.8 XP1.3 | length 5.4
  Top Layer w0.25: XP1.3 DD2.8
SWDIO: DD2.7 XP1.2 | length 6
  Top Layer w0.25: XP1.2 3.028,15 DD2.7
TX: DD2.2 XP2.3 | length 7.8
  Top Layer w0.25: XP2.3 3.475,22.503 3.475,21.483 4.958,20 DD2.2
VBAT: R3.2 SW1.2 X2.1 X3-1.1 XT1.1 | length 54.5
  Top Layer w0.2: 11.762,47.75 X2.1
  Top Layer w0.25: XT1.1 6.827,43.79 5,41.963 5,30.6 6.443,29.157 10.23,29.157 12.267,27.121 R3.2
  Top Layer w0.5: SW1.2 XT1.1@6.827,43.79 ; XT1.1 11.762,43.83 ; 11.762,47.75 11.762,43.83 ; X3-1.1 11.762,43.83
VBAT_ADC: DD2.32 R3.1 R4.2 VBAT_ADC.1 | length 6.6
  Top Layer w0.25: VBAT_ADC.1 8.75,25.5 8.767,25.483 R3.1 DD2.32
pads on no net: DD2.3 DD2.6 DD2.19 DD2.20 DD2.25 DD2.26 DD2.27 DD2.29 DD2.30 DD2.31 L1.3 L1.4 SW1.1 X2.2 X2.3 X2.4

## Polygon pours and split planes (outlines as drawn)
GND on Top Layer "GND_L01_P000" (solid, pour order 0): 29.75,0.25 0.25,0.25 0.25,53.5 29.75,53.5
GND on Bottom Layer "GND_L02_P001" (solid, pour order 1): 29.75,0.25 0.25,0.25 0.25,53.5 29.75,53.5

## Silkscreen, mask and mechanical layers (free items; w line width, h text height)
Top Overlay:
  text "+V" at 3.1,29.095 h0.75
  text "RX" at 3.2,26.646 h0.75
  text "TX" at 3.1,24.125 h0.75
  text "GND" at 3.1,21.475 h0.75
  text "+V" at 3.1,18.725 h0.75
  text "DIO" at 3.1,16.165 h0.75
  text "CLK" at 3.1,13.625 h0.75
  text "RST" at 3.1,11.125 h0.75
  text "GND" at 3.1,8.545 h0.75
Board:
  the board outline again, w0.254

## Dimensions
0,53.7 to 30,0 on Graphics
0,53.7 to 0,0 on Graphics

## Text inside footprints (layer, text, board x,y; h text height)
X2: Top Assembly "PCB Edge" at 6.037,53.44 h0.5 r180